# Altium PCB MEMS Microphone Module.PcbDoc
Units mm, origin at the board's own origin, x right, y up, seen from the top; angles counter-clockwise.
Board outline 19.28 x 15 mm, 2 copper layers (Top Layer, Bottom Layer); 13 components, 7 nets, 32 pads, 0 vias.
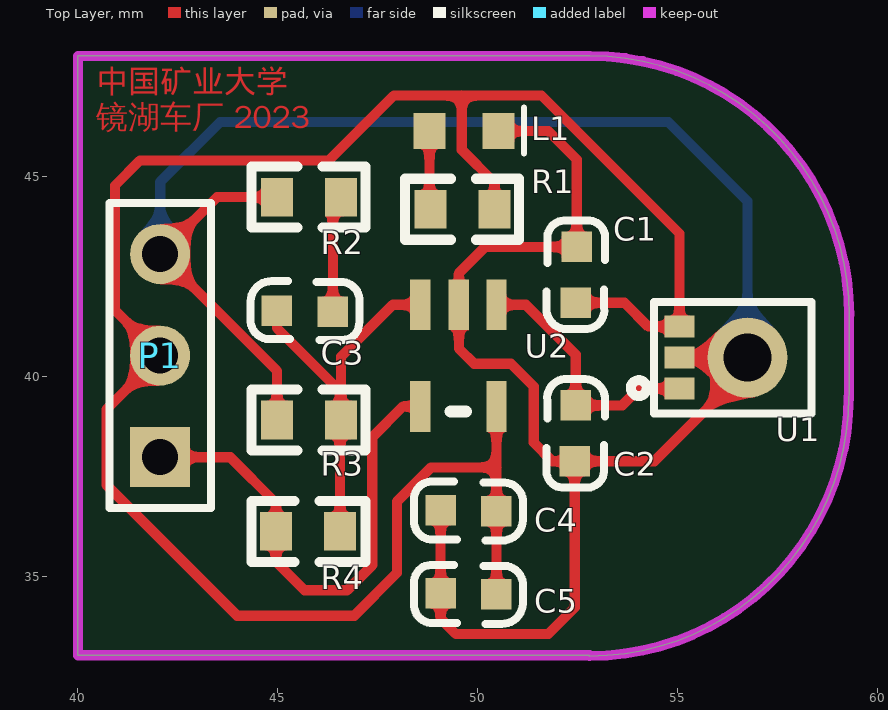
[diagram p0: Top Layer view]
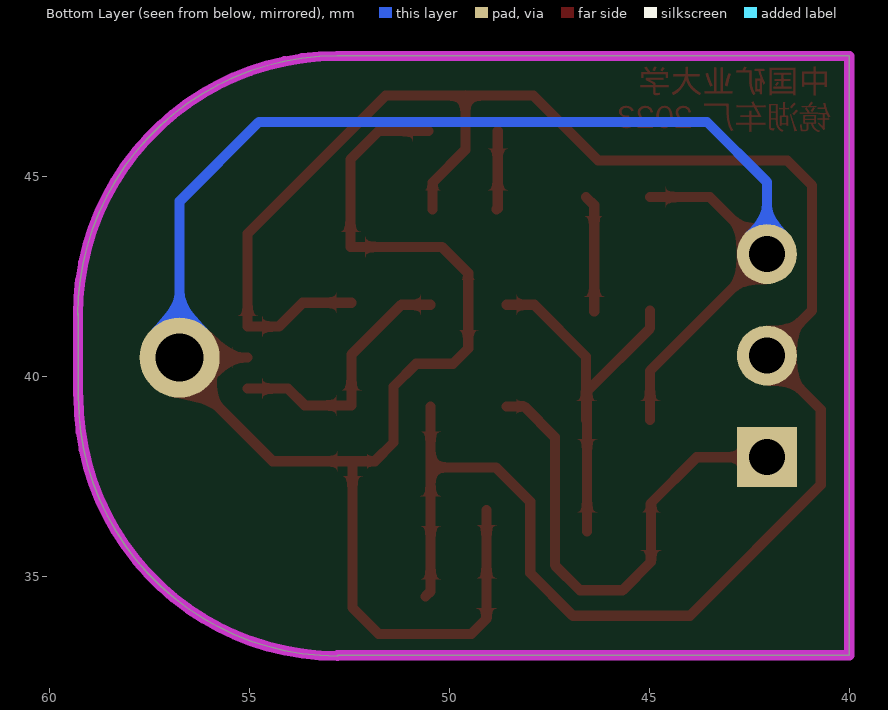
[diagram p1: Bottom Layer view, seen from below]
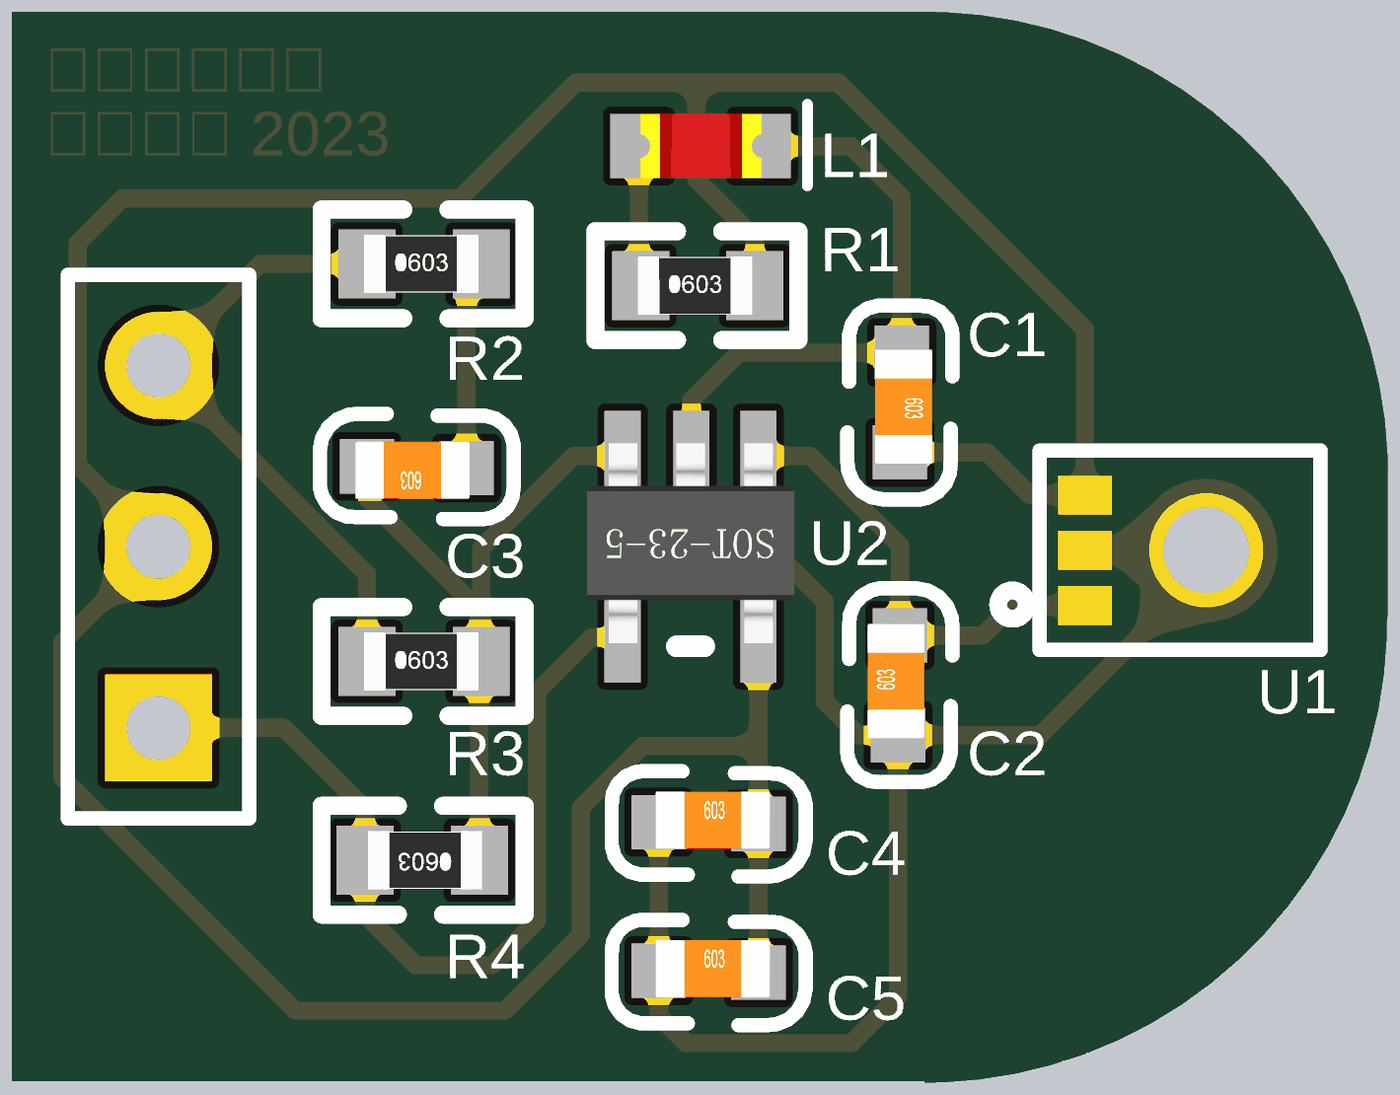
[diagram p2: 3D render of the assembled board from above, using the file's embedded part models]

## Layer stack, top to bottom
Top Solder: solder mask 0.0102, Solder Resist, Dk 3.5
Top Layer: signal copper 0.0356
Dielectric 1: dielectric 0.32, FR-4, Dk 4.8
Bottom Layer: signal copper 0.0356
Bottom Solder: solder mask 0.0102, Solder Resist, Dk 3.5

## Board outline
40.005,33.02 52.794,33.02 52.794,33.003 ccw(c52.794,39.484) 59.275,39.484 59.284,39.535 59.284,41.575 59.288,41.525 ccw(c52.807,41.525) 52.807,48.006 40.005,48.006

## Design rules (kind name [scope] priority, off if disabled: settings)
Clearance [All] p1: gap=0.152 ignorepadtopadclearanceinfootprint=FALSE except(0: Arc-Hole Track-Hole SMDPad-Hole THPad-Hole Via-Hole Fill-Hole Poly-Hole Region-Hole Text-Hole)
HoleToHoleClearance [All] p1: gap=0 allowstackedmicrovias=TRUE
MinimumSolderMaskSliver [All] p1: minsoldermaskwidth=0
PolygonConnect [All] p1: connectstyle=Relief reliefconductorwidth=0.254 reliefentries=4 polygonreliefangle="90 Angle" airgapwidth=0.254
RoutingVias [All] p1: holewidth=0.711 width=1.27 viastyle="Through Hole" minholewidth=0.711 minwidth=1.27 maxholewidth=0.711 maxwidth=1.27
SilkToSilkClearance [All] p1: silktosilkclearance=0
SilkToSolderMaskClearance [IsPad] p1: minsilkscreentomaskgap=0 clearancetoexposedcopper=TRUE
SolderMaskExpansion [All] p1: expansion=0.102
Width [All] p1: maxlimit=0.254 minlimit=0.152 preferedwidth=0.254 minimp=50.000000 maximp=50.000000 favimp=50.000000
26 further rules are at their usual default settings.

## Components (designator, comment, footprint, x,y, rotation, side; value= is the part's Value field where it differs from the comment)
C1 "100nF" 0603C 52.485,43.236 r270 top
C2 "100pF" 0603C 52.416,37.866 r90 top
C3 "1uF" 0603C 46.384,41.603 r180 top
C4 "100nf" 0603C 49.067,36.661 r0 top
C5 "47uF" 0603C 49.067,34.578 r0 top
L1 "红灯" LQ_LED0603R 48.793,46.126 r0 top (schematic designator DV1)
P1 "Header 3" HDR1X3 42.062,37.973 r90 top
R1 "1k" 0603R 48.819,44.171 r0 top
R2 "2.5k" 0603R 44.983,44.475 r0 top
R3 "510k" 0603R 44.983,38.904 r0 top
R4 "120k" 0603R 46.558,36.119 r180 top
U1 "IM68A130" IM68A130 55.044,40.462 r0 top
U2 "LMV321IDBVR" LQ_SOT-23-5 50.47,41.783 r0 top

## Footprints (in the part's own frame and the unit in brackets; to place one, negate y for a bottom-side part, rotate by r counter-clockwise, add the part's x,y. Pads: shape width x height; smd on the part's side, far side on the other; paste and mask are expansions set on the pad)
0603C [mil]
  rect 30x30 smd: 1(0.21,-0.35) 2(55.21,-1.35)
  silkscreen extent -26,-30 81,28, body extent -1,-15 62,17, height 12
0603R [mm]
  rect 0.8x0.965 smd: 1(0,0) 2(1.6,0)
  silkscreen extent -0.64,-0.76 2.21,0.76, body extent -0.04,-0.41 1.56,0.41, height 0.45
HDR1X3 [mm] "Connector; Header; 3 Position"
  rect 1.5x1.5 hole 0.9: 1(0,0)
  round 1.5 hole 0.9: 2(2.54,0) 3(5.08,0)
  silkscreen extent -1.27,-1.27 6.35,1.27
IM68A130 [mm] "Microphone; 5 pin, 4.00 mm L X 3.00 mm W X 1.30 mm H body"
  rect 0.75x0.55 smd paste-0.3 mask+0: 1(0,-0.775) 2(0,0) 3(0,0.775)
  round 2 hole 1.2 paste-0.2 mask-0.2: 4(1.7,0)
  silkscreen extent -1.22,-1.4 3.3,1.4
LQ_LED0603R [mm]
  rect 0.8x0.9 smd: 1(0,0) 2(1.727,0)
  silkscreen extent 2.36,-0.56 2.36,0.58, body extent 0.02,-0.45 1.72,0.45, height 0.9
LQ_SOT-23-5 [mil]
  rect 20x50 smd: 1(0,0) 2(-37,0) 3(-75,0) 4(-75,-100) 5(0,-100)
  silkscreen extent -45,-105 -30,-105, body extent -94,-103 20,7, height 47

## Part data
C1 C2 C3 C4 C5: library part CAP, "无极性电容"
L1: library part LQ_LED
P1: "Header, 3-Pin", LatestRevisionDate=17-Jul-2002, LatestRevisionNote="Re-released for DXP Platform.", Publisher="Altium Limited"
R1 R2 R3 R4: library part RES
U1: "High Performance Digital XENSIV MEMS Microphone"
U2: "LMV321ID"

## Nets (pads, with @x,y where several pads share a name; then routed paths per layer and width w, separated by ;. In a path a pad name is that pad's centre, name@x,y a point inside that pad or via, vN(x,y) a via of type N, cw(c..) or ccw(c..) an arc to the next point about the centre after c; other vN are vias at no path point)
A3V3: C1.2 C4.2 C5.2 P1.2 R1.2 U1.3 U2.5 | length 51.8
  Top Layer w0.254: R1.2 50.419,44.839 49.6,45.658 49.6,47.015 ; U2.5 50.47,37.719 ; C5.2@50.597,34.493 50.47,34.62 C4.2 50.47,37.719 ; C1.2 53.67,41.834 54.267,41.237 U1.3 55.044,43.566 51.595,47.015 49.6,47.015 ; 49.6,47.015 47.904,47.015 46.279,45.39 41.554,45.39 40.931,44.767 40.931,41.644 P1.2 40.716,39.167 40.716,37.28 43.986,34.011 46.914,34.011 47.981,35.077 47.981,36.861 48.839,37.719 50.47,37.719
AGND: C1.1 C2.1 C4.1 C5.1 L1.2 P1.3 R2.1 R3.1 U1.2 U1.4 U2.2 | length 62.8
  Top Layer w0.254: R3.1 44.983,40.132 P1.3 43.485,44.475 R2.1 ; C4.1 C5.1 49.073,33.934 49.454,33.553 51.765,33.553 52.425,34.214 C2.1 ; L1.2 51.765,46.126 52.476,45.415 C1.1 50.19,43.231 49.53,42.57 U2.2 49.53,40.691 49.911,40.31 50.831,40.31 51.4,39.741 51.4,38.339 51.867,37.871 C2.1 ; U1.2 U1.4 ; U1.4@56.744,40.726 U1.4 ; C2.1 54.417,37.871 56.744,40.198 U1.4
  Bottom Layer w0.254: P1.3 42.062,44.856 43.561,46.355 54.762,46.355 56.744,44.374 U1.4
NetC2_2: C2.2 U1.1 U2.1 | length 6.5
  Top Layer w0.254: U2.1 51.201,41.783 52.451,40.533 C2.2 53.615,39.268 54.034,39.687 U1.1
NetC3_1: C3.1 R2.2 | length 2.9
  Top Layer w0.254: C3.1 46.379,44.271 R2.2
NetC3_2: C3.2 R3.2 R4.1 U2.3 | length 10.3
  Top Layer w0.254: C3.2 44.982,41.2 46.558,39.624 R4.1 ; R3.2 46.583,40.487 47.879,41.783 U2.3
NetDV1_1: L1.1 R1.1 | length 2
  Top Layer w0.254: L1.1 48.793,44.196 R1.1
NetP1_1: P1.1 R4.2 U2.4 | length 12.5
  Top Layer w0.254: P1.1 43.815,37.973 44.958,36.83 R4.2 44.958,35.357 45.669,34.646 46.736,34.646 47.364,35.274 47.364,38.474 48.133,39.243 U2.4

## Keep-outs
Keep-Out Layer:
  lines w0.254: 52.794,33.003 ccw(c52.794,39.484) 59.275,39.484 ; 52.794,33.02 40.005,33.02 40.005,48.006 52.807,48.006 cw(c52.807,41.525) 59.288,41.525 ; 59.284,39.535 59.284,41.575

## Other copper
Top Layer:
  text "中国矿业大学" at 40.462,46.888 h1
  text "镜湖车厂 2023" at 40.463,45.999 h1